# EAGLE board Copy of ERC Hacka (EAGLE 9.7.0)

Size 461.36 x 316.57 mm. Coordinates in mm from the lower left corner, seen from the top.
Outline: 0,0 461.36,0 461.36,316.57 0,316.57 0,0
Copper layers (1*16): Top 0.035mm / dielectric 1.5mm / Bottom 0.035mm
Design rules "default": minimum track width 6mil, minimum drill 0.35mm, track to track 6mil, track to pad 6mil, pad to pad 6mil, via to via 6mil, smd to smd 6mil, copper to edge 40mil, drill to drill 6mil, minimum pad ring 10mil, minimum via ring 8mil, stop-mask expansion 4mil, vias tented up to drill 0mil, thermal gap 10mil

## Footprints (pad centres in the part's own frame; a part is rotated, then mirrored left to right if it is on the bottom)
BATTERY-GENERIC = drill 1.118 pad 3.15 octagon: + 2.54,0; - -2.54,0
CAP-THRU-2.54MM = drill 1.016 pad 1.88: 1 -1.27,0; 2 1.27,0
DIODE-AXIAL = drill 1: 1 -5.08,0; 2 5.08,0
LED-RGB-5MM = drill 0.9: B 0.635,0.635; C -0.635,-0.635; G 1.905,-0.635; R -1.905,0.635
7SEG-13 = drill 0.813 long: 1 -5.08,-7.62; 2 -2.54,-7.62; 3 0,-7.62; 4 2.54,-7.62; 5 5.08,-7.62; 6 5.08,7.62; 7 2.54,7.62; 8 0,7.62; 9 -2.54,7.62; 10 -5.08,7.62
LU-5-R = drill 0.8: 1 -6.35,-3.81; 5 3.81,-3.81; 6 6.35,-3.81; 7 6.35,3.81; 8 3.81,3.81; 12 -6.35,3.81
INDRD2743W50D3810H2616B = drill 0.708 pad 1.308: 1 -13.716,0; 2 13.716,0
MOTOR = drill 1.118 pad 3.15 octagon: + 2.54,0; - -2.54,0
PIEZO = drill 1 pad 1.6: 1 -3.5,0; 2 3.5,0
RESAD1016W63L850D250B = drill 0.83 pad 1.43: 1 -5.08,0; 2 5.08,0
HA-06-SM065 = drill 1 pad 1.676: 1 -2.54,-2.54; 2 0,2.54; 3 2.54,-2.54
DIP826W53P254L959H508Q8B = drill 0.786 pad 1.386: 1 -4.13,3.81; 2 -4.13,1.27; 3 -4.13,-1.27; 4 -4.13,-3.81; 5 4.13,-3.81; 6 4.13,-1.27; 7 4.13,1.27; 8 4.13,3.81
DIP762W53P254L1969H508Q16B = drill 0.743 pad 1.343: 1 -3.81,8.89; 2 -3.81,6.35; 3 -3.81,3.81; 4 -3.81,1.27; 5 -3.81,-1.27; 6 -3.81,-3.81; 7 -3.81,-6.35; 8 -3.81,-8.89; 9 3.81,-8.89; 10 3.81,-6.35; 11 3.81,-3.81; 12 3.81,-1.27; 13 3.81,1.27; 14 3.81,3.81; 15 3.81,6.35; 16 3.81,8.89
ARDUINO-UNO-R3-SHIELD = drill 1.016 pad 1.88: 3.3V 24.13,-2.54; 5V 24.13,0; A0 24.13,12.7; A1 24.13,15.24; A2 24.13,17.78; A3 24.13,20.32; A4 24.13,22.86; A5 24.13,25.4; AREF -24.13,-13.97; D2 -24.13,20.32; D3 -24.13,17.78; D4 -24.13,15.24; D5 -24.13,12.7; D6 -24.13,10.16; D7 -24.13,7.62; D8 -24.13,3.81; D9 -24.13,1.27; D10 -24.13,-1.27; D11 -24.13,-3.81; D12 -24.13,-6.35; D13 -24.13,-8.89; GND@0 24.13,2.54; GND@1 24.13,5.08; GND@2 -24.13,-11.43; IOREF 24.13,-7.62; NC 24.13,-10.16; RES 24.13,-5.08; RX -24.13,25.4; SCL -24.13,-19.05; SDA -24.13,-16.51; TX -24.13,22.86; VIN 24.13,7.62

## Placement (x,y rotation side)
BAT1  9V  [BATTERY-GENERIC]  46.19,45.55 270 top
BAT2  9V  [BATTERY-GENERIC]  253.41,70.97 90 top
BAT7  9V  [BATTERY-GENERIC]  86.94,206.69 270 top
BATBIAS_BATTERY3  1.5V  [BATTERY-GENERIC]  194.06,260.06 90 top
BATBIAS_BATTERY6  1.5V  [BATTERY-GENERIC]  39.76,246.01 330 top
BATBIAS_BATTERY8  1.5V  [BATTERY-GENERIC]  8.26,277.06 90 top
C1  1u  [CAP-THRU-2.54MM]  72.82,105.3 0 top
C2  10u  [CAP-THRU-2.54MM]  90.6,107.84 0 top
D1  DIODEDIODE-AXIAL  [DIODE-AXIAL]  73.51,287.36 90 top
D2  DIODEDIODE-AXIAL  [DIODE-AXIAL]  96.37,287.36 90 top
D3  DIODEDIODE-AXIAL  [DIODE-AXIAL]  121.77,287.36 90 top
D4  LED-RGBRCBG-PTH  [LED-RGB-5MM]  387.07,66.98 0 top
DIGIT1  7SEG-CA  [7SEG-13]  442.23,43.75 0 top
K5V_RELAY1  RELAY-SPDT_LU-5-R  [LU-5-R]  44.59,20.76 180 top
K9V_RELAY  RELAY-SPDT_LU-5-R  [LU-5-R]  133.75,237.4 180 top
K9V_RELAY1  RELAY-SPDT_LU-5-R  [LU-5-R]  115.14,237.22 180 top
K9V_RELAY2  RELAY-SPDT_LU-5-R  [LU-5-R]  98.21,237.38 180 top
L1  288m  [INDRD2743W50D3810H2616B]  84.25,105.3 0 top
LINPUT_COIL  10u  [INDRD2743W50D3810H2616B]  209.87,294.28 90 top
LSENDER_COIL  10u  [INDRD2743W50D3810H2616B]  147.92,115.64 0 top
M1  MOTOR_HDR  [MOTOR]  269.81,186.74 0 top
M2  MOTOR_HDR  [MOTOR]  269.85,140.96 0 top
M3  MOTOR_HDR  [MOTOR]  302.37,187.14 0 top
M4  MOTOR_HDR  [MOTOR]  301.9,141.64 0 top
PIEZO1  PIEZO  [PIEZO]  410.48,53.91 0 top
R1  1k  [RESAD1016W63L850D250B]  45.52,285.26 90 top
R2  1k  [RESAD1016W63L850D250B]  45.52,275.1 90 top
R3  1k  [RESAD1016W63L850D250B]  56.8,263.28 90 top
R4  2.2k  [RESAD1016W63L850D250B]  61.39,128.16 0 top
R5  1k  [RESAD1016W63L850D250B]  56.8,253.12 90 top
R6  220  [RESAD1016W63L850D250B]  449.85,33.59 0 top
R7  220  [RESAD1016W63L850D250B]  452.39,31.05 0 top
R8  1k  [RESAD1016W63L850D250B]  168.08,265.31 90 top
R9  1k  [RESAD1016W63L850D250B]  168.08,255.15 90 top
R10  220  [RESAD1016W63L850D250B]  434.61,33.59 0 top
R11  220  [RESAD1016W63L850D250B]  432.07,31.05 0 top
R12  220  [RESAD1016W63L850D250B]  434.61,56.45 0 top
R13  220  [RESAD1016W63L850D250B]  432.07,58.99 0 top
R14  220  [RESAD1016W63L850D250B]  449.85,56.45 0 top
R15  220  [RESAD1016W63L850D250B]  452.39,58.99 0 top
R16  1k  [RESAD1016W63L850D250B]  390.88,61.9 90 top
R17  1k  [RESAD1016W63L850D250B]  388.34,61.9 90 top
R18  1k  [RESAD1016W63L850D250B]  383.26,61.9 90 top
RPOT2  55k  [HA-06-SM065]  93.95,73.03 0 top
RPOT3  25k  [HA-06-SM065]  23.77,115.2 0 top
U1  LM555_DIP  [DIP826W53P254L959H508Q8B]  47.42,114.19 90 top
U2  L293E  [DIP762W53P254L1969H508Q16B]  299.93,99.43 90 top
U3  ARDUINO-UNO-R3-SHIELD  [ARDUINO-UNO-R3-SHIELD]  336.68,29.84 270 top

## Library data of the parts
BAT1 BAT2 BAT7 BATBIAS_BATTERY3 BATBIAS_BATTERY6 BATBIAS_BATTERY8 C1 C2 D1-D4 K5V_RELAY1 K9V_RELAY K9V_RELAY1 K9V_RELAY2 M1-M4 PIEZO1 R1-R18 RPOT2 RPOT3 U2 U3 = Tinkercad
DIGIT1 = Tinkercad; CATEGORY: Opto-Electronic; SUB-CATEGORY: Display; TYPE: 7-Segment
L1 LINPUT_COIL LSENDER_COIL = Tinkercad; CATEGORY: Inductor; SUB-CATEGORY: Fixed
U1 = Tinkercad; CATEGORY: IC_Clock-Timing; CURRENT-SUPPLY: 10mA; DESCRIPTION: IC OSC SINGLE TIMER 100KHZ 8-DIP; FREQUENCY: 100kHz; MANUFACTURER: Texas Instruments; MPN: LM555CN/NOPB; OPERATING_TEMP: 0°C to 70°C; PART_STATUS: Active; ROHS_COMPLIANT: ROHS3 Compliant; SUB-CATEGORY: Timer

## Nets
BAT1+: BAT1.+ K5V_RELAY1.1
BAT1-: BAT1.- C1.2 C2.2 LSENDER_COIL.2 RPOT2.3 U1.1
BAT2+: BAT2.+ U2.16
BAT2-: BAT2.- D4.C DIGIT1.3 DIGIT1.8 K5V_RELAY1.8 PIEZO1.2 U2.4 U2.5 U2.12 U2.13 U3.GND@0 U3.GND@1 U3.GND@2
BAT7+: BAT7.+ LINPUT_COIL.1
BATBIAS_BATTERY3+: BATBIAS_BATTERY3.+ R8.2
BATBIAS_BATTERY3-: BAT7.- BATBIAS_BATTERY3.- BATBIAS_BATTERY6.- BATBIAS_BATTERY8.- K9V_RELAY1.8 K9V_RELAY2.8 K9V_RELAY.8 R2.1 R3.2 R9.1
BATBIAS_BATTERY6+: BATBIAS_BATTERY6.+ R5.1
BATBIAS_BATTERY8+: BATBIAS_BATTERY8.+ R1.2
D4_B: D4.B R17.2
D4_G: D4.G R16.2
D4_R: D4.R R18.2
DIGIT1_A: DIGIT1.7 R14.1
DIGIT1_B: DIGIT1.6 R15.1
DIGIT1_C: DIGIT1.4 R6.1
DIGIT1_D: DIGIT1.2 R10.2
DIGIT1_DP: DIGIT1.5 R7.1
DIGIT1_E: DIGIT1.1 R11.2
DIGIT1_F: DIGIT1.9 R12.2
DIGIT1_G: DIGIT1.10 R13.2
K9V_RELAY1_NC: K9V_RELAY1.7 K9V_RELAY2.12
K9V_RELAY_NC: K9V_RELAY1.12 K9V_RELAY.7
L1_2: C2.1 L1.2 LSENDER_COIL.1
LINPUT_COIL_2: D1.2 D2.2 D3.2 LINPUT_COIL.2
M1_-: M1.- M2.- U2.3
M2_+: M1.+ M2.+ U2.6
M3_-: M3.- M4.- U2.11
M4_+: M3.+ M4.+ U2.14
R2_2: D1.1 K9V_RELAY.5 R1.1 R2.2
R5_2: D2.1 K9V_RELAY1.5 R3.1 R5.2
R9_2: D3.1 K9V_RELAY2.5 R8.1 R9.2
U1_!RST: RPOT2.1 U1.4
U1_CV: RPOT2.2 U1.5
U1_DIS: R4.1 RPOT3.3 U1.7
U1_OUT: L1.1 U1.3
U1_TR: C1.1 RPOT3.1 RPOT3.2 U1.2 U1.6
U1_V+: K5V_RELAY1.6 R4.2 U1.8
U3_5V: K9V_RELAY.12 U2.1 U2.8 U2.9 U3.5V
U3_A0: R11.1 U3.A0
U3_A1: R10.1 U3.A1
U3_A2: R7.2 U3.A2
U3_A3: R6.2 U3.A3
U3_A4: R15.2 U3.A4
U3_A5: R14.2 U3.A5
U3_D2: U2.7 U3.D2
U3_D3: R16.1 U3.D3
U3_D4: U2.15 U3.D4
U3_D5: R17.1 U3.D5
U3_D6: R18.1 U3.D6
U3_D7: U2.2 U3.D7
U3_D8: K9V_RELAY.6 U3.D8
U3_D9: K9V_RELAY1.6 U3.D9
U3_D10: K9V_RELAY2.6 U3.D10
U3_D11: K9V_RELAY2.7 U3.D11
U3_D12: R12.1 U3.D12
U3_D13: R13.1 U3.D13
U3_RX: U2.10 U3.RX
U3_SDA: PIEZO1.1 U3.SDA
U3_TX: K5V_RELAY1.5 U3.TX

## Tracks (layer width: path | path; a pad name or v marks a point on that pad's centre or on a via)
BAT1+  (1 unrouted)
BAT1-  (5 unrouted)
BAT2+  (1 unrouted)
BAT2-  (12 unrouted)
BAT7+  (1 unrouted)
BATBIAS_BATTERY3+  (1 unrouted)
BATBIAS_BATTERY3-  (9 unrouted)
BATBIAS_BATTERY6+  (1 unrouted)
BATBIAS_BATTERY8+  (1 unrouted)
D4_B  (1 unrouted)
D4_G  (1 unrouted)
D4_R  (1 unrouted)
DIGIT1_A  (1 unrouted)
DIGIT1_B  (1 unrouted)
DIGIT1_C  (1 unrouted)
DIGIT1_D  (1 unrouted)
DIGIT1_DP  (1 unrouted)
DIGIT1_E  (1 unrouted)
DIGIT1_F  (1 unrouted)
DIGIT1_G  (1 unrouted)
K9V_RELAY1_NC  (1 unrouted)
K9V_RELAY_NC  (1 unrouted)
L1_2  (2 unrouted)
LINPUT_COIL_2  (3 unrouted)
M1_-  (2 unrouted)
M2_+  (2 unrouted)
M3_-  (2 unrouted)
M4_+  (2 unrouted)
R2_2  (3 unrouted)
R5_2  (3 unrouted)
R9_2  (3 unrouted)
U1_!RST  (1 unrouted)
U1_CV  (1 unrouted)
U1_DIS  (2 unrouted)
U1_OUT  (1 unrouted)
U1_TR  (4 unrouted)
U1_V+  (2 unrouted)
U3_5V  (4 unrouted)
U3_A0  (1 unrouted)
U3_A1  (1 unrouted)
U3_A2  (1 unrouted)
U3_A3  (1 unrouted)
U3_A4  (1 unrouted)
U3_A5  (1 unrouted)
U3_D2  (1 unrouted)
U3_D3  (1 unrouted)
U3_D4  (1 unrouted)
U3_D5  (1 unrouted)
U3_D6  (1 unrouted)
U3_D7  (1 unrouted)
U3_D8  (1 unrouted)
U3_D9  (1 unrouted)
U3_D10  (1 unrouted)
U3_D11  (1 unrouted)
U3_D12  (1 unrouted)
U3_D13  (1 unrouted)
U3_RX  (1 unrouted)
U3_SDA  (1 unrouted)
U3_TX  (1 unrouted)